# EAGLE board Board Relay Danu Kartiko K (EAGLE 9.6.1)
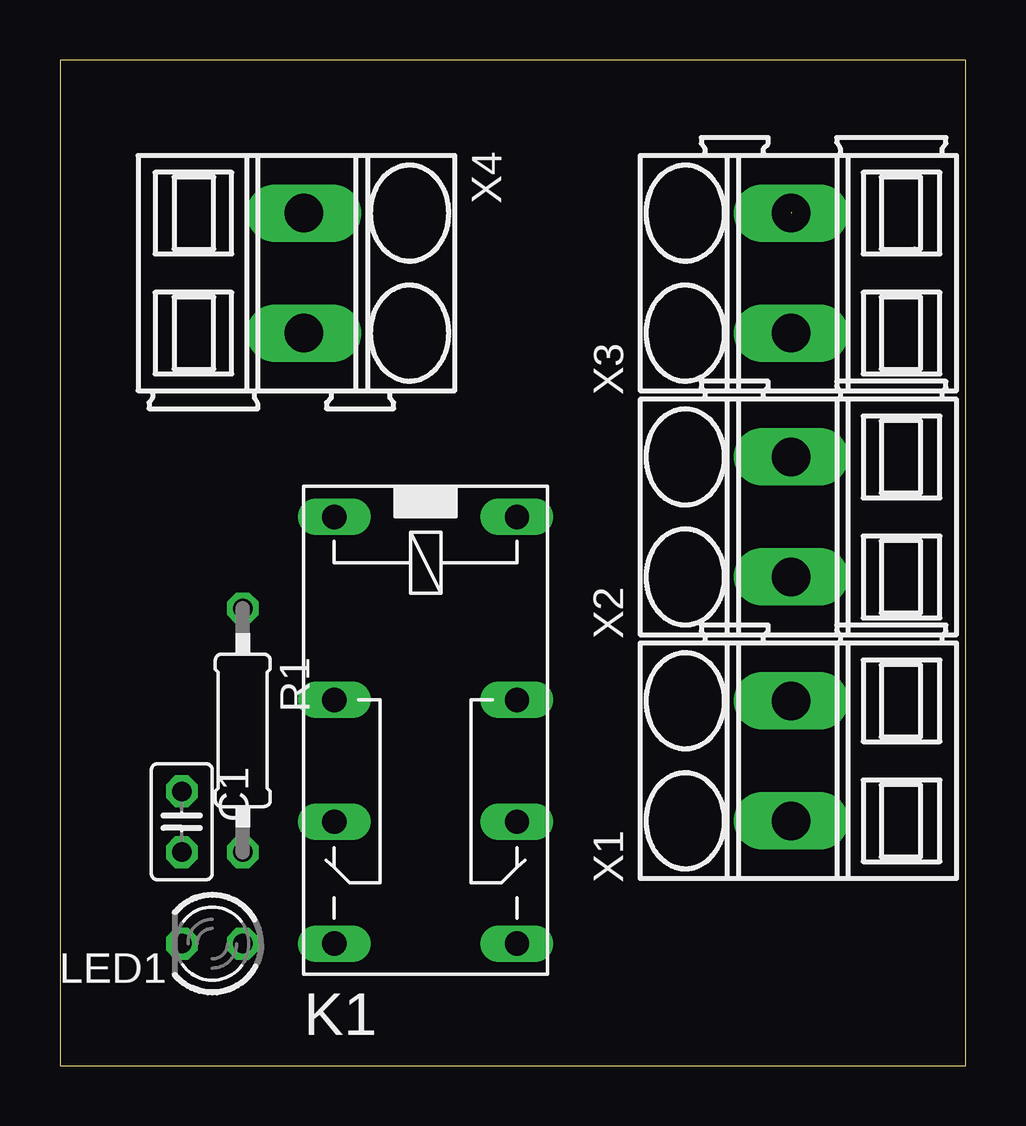
[diagram p0: board, top side]
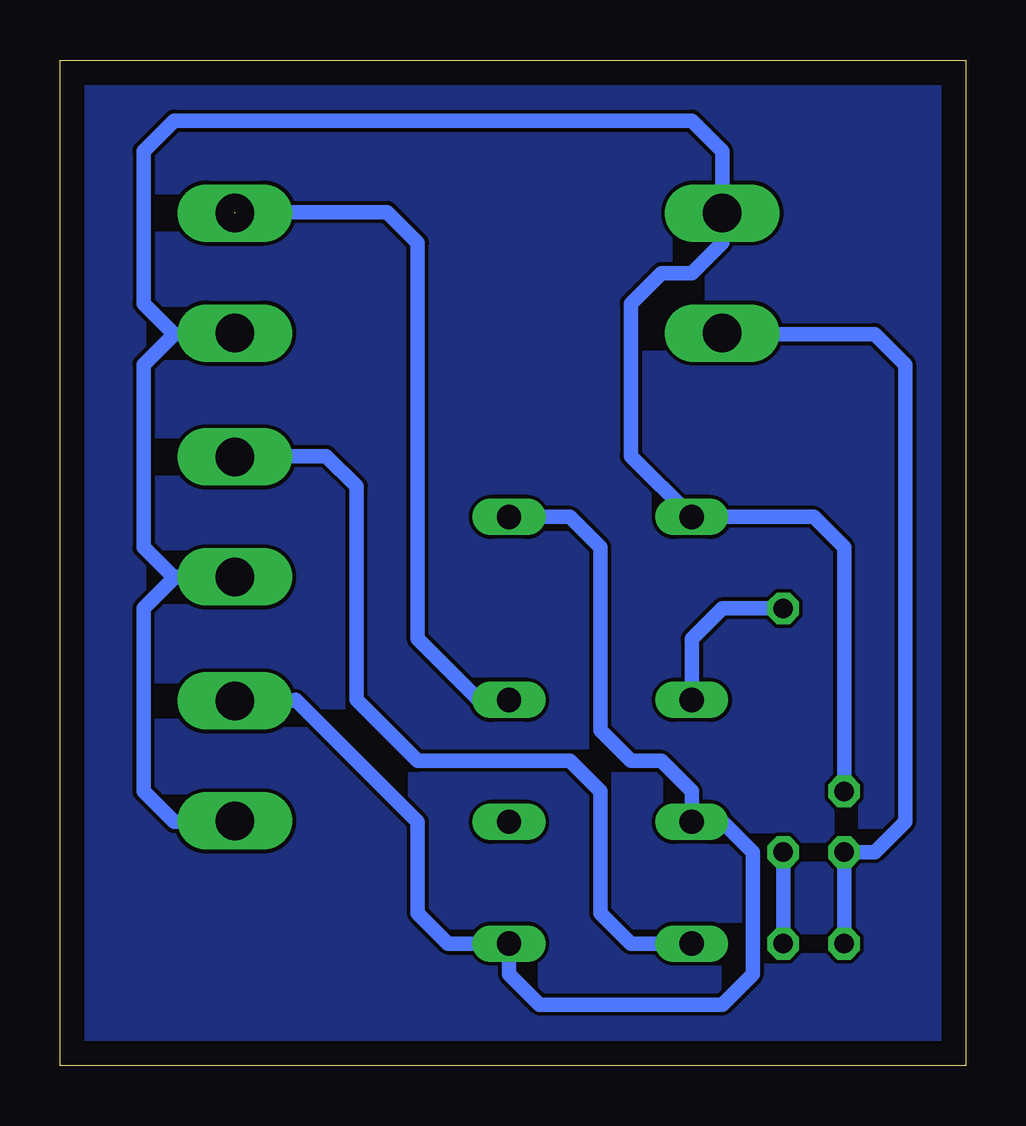
[diagram p1: board, bottom side, seen from below]

Size 37.77 x 41.9 mm. Coordinates in mm from the lower left corner, seen from the top.
Outline: 0,0 37.77,0 37.77,41.9 0,41.9 0,0
Copper layers (1*16): Top 0.035mm / dielectric 1.5mm / Bottom 0.035mm
Design rules "default": minimum track width 6mil, minimum drill 0.35mm, track to track 6mil, track to pad 6mil, pad to pad 6mil, via to via 6mil, smd to smd 6mil, copper to edge 40mil, drill to drill 6mil, minimum pad ring 10mil, minimum via ring 8mil, stop-mask expansion 4mil, vias tented up to drill 0mil, thermal gap 10mil

## Footprints (pad centres in the part's own frame; a part is rotated, then mirrored left to right if it is on the bottom)
C025-025X050 = drill 0.813 octagon: 1 -1.27,0; 2 1.27,0
351 = drill 1.016 long: 1 -3.81,-3.81; 16 -3.81,3.81; O1 8.89,-3.81; O2 8.89,3.81; P1 3.81,-3.81; P2 3.81,3.81; S1 13.97,-3.81; S2 13.97,3.81
LED3MM = drill 0.813 octagon: A -1.27,0; K 1.27,0
0207/10 = drill 0.813 octagon: 1 -5.08,0; 2 5.08,0
SMKDSP_1,5/2 = drill 1.6 pad 1.8 long: 1 -2.5,0; 2 2.5,0

## Placement (x,y rotation side)
C1  [C025-025X050]  5.08,10.16 270 top
K1  351  [351]  15.24,19.05 270 top
LED1  [LED3MM]  6.35,5.08 180 top
R1  [0207/10]  7.62,13.97 270 top
X1  SMKDSP_1,5/2  [SMKDSP_1,5/2]  30.48,12.7 90 top
X2  SMKDSP_1,5/2  [SMKDSP_1,5/2]  30.48,22.86 90 top
X3  SMKDSP_1,5/2  [SMKDSP_1,5/2]  30.48,33.02 90 top
X4  SMKDSP_1,5/2  [SMKDSP_1,5/2]  10.16,33.02 270 top

## Library data of the parts
C1 = rcl; SPICEPREFIX: C
K1 = relay; OC_FARNELL: unknown; OC_NEWARK: unknown
LED1 = led
R1 = rcl; SPICEPREFIX: R
X1-X4 = con-phoenix-smkdsp; MF: FARNELL; MPN: 1733570; OC_FARNELL: 3041244; OC_NEWARK: 69C8588

## Nets
GND: C1.1 K1.1 X1.1 X2.1 X3.1 X4.1
N$1: K1.P1 R1.1
N$2: LED1.A R1.2
O1: K1.S1 X2.2
P2: K1.P2 X3.2
S12: K1.16 K1.O1 K1.S2 X1.2
VOUT: C1.2 LED1.K X4.2

## Tracks (layer width: path | path; a pad name or v marks a point on that pad's centre or on a via)
G_
  pour Bottom: 0,41.91 0,0 38.1,0 38.1,41.91
GND
  Bottom 0.61: C1.1 5.08,21.59 6.35,22.86 K1.1 13.97,25.4 13.97,31.75 12.7,33.02 11.43,33.02 10.16,34.29 X4.1 10.16,38.1 11.43,39.37 33.02,39.37 34.29,38.1 34.29,31.75 33.02,30.48 | X3.1 30.52,30.48 33.02,30.48 | 33.02,30.48 34.29,29.21 34.29,21.59 33.06,20.36 | 33.02,20.32 33.06,20.36 | 33.02,20.32 30.52,20.32 X2.1 33.06,20.36 | X1.1 30.52,10.16 33.02,10.16 34.29,11.43 34.29,19.05 33.02,20.32
N$1
  Bottom 0.61: R1.1 10.16,19.05 11.43,17.78 K1.P1
N$2
  Bottom 0.61: R1.2 LED1.A
O1
  Bottom 0.61: K1.S1 13.97,5.08 15.24,6.35 15.24,11.43 16.51,12.7 22.86,12.7 25.4,15.24 25.4,24.13 26.67,25.4 30.44,25.4 X2.2
P2  (1 unrouted)
  Bottom 0.61: K1.P2 20.32,15.24 22.86,17.78 22.86,34.29 24.13,35.56 30.48,35.56
S12
  Bottom 0.61: K1.16 16.51,22.86 15.24,21.59 15.24,13.97 13.97,12.7 12.7,12.7 11.43,11.43 K1.O1 10.16,10.16 8.89,8.89 8.89,3.81 10.16,2.54 17.78,2.54 19.05,3.81 K1.S2 21.59,5.08 22.86,6.35 22.86,10.16 27.94,15.24 27.98,15.2 X1.2
VOUT
  Bottom 0.61: LED1.K C1.2 3.81,8.89 2.54,10.16 2.54,29.21 3.81,30.48 10.12,30.48 X4.2